# Altium PCB LNA_Rev3bPCB.PcbDoc
Units mm, origin at the board's own origin, x right, y up, seen from the top; angles counter-clockwise.
Board outline 65 x 56 mm, 2 copper layers (Top Layer, Bottom Layer); 48 components, 22 nets, 140 pads, 113 vias.
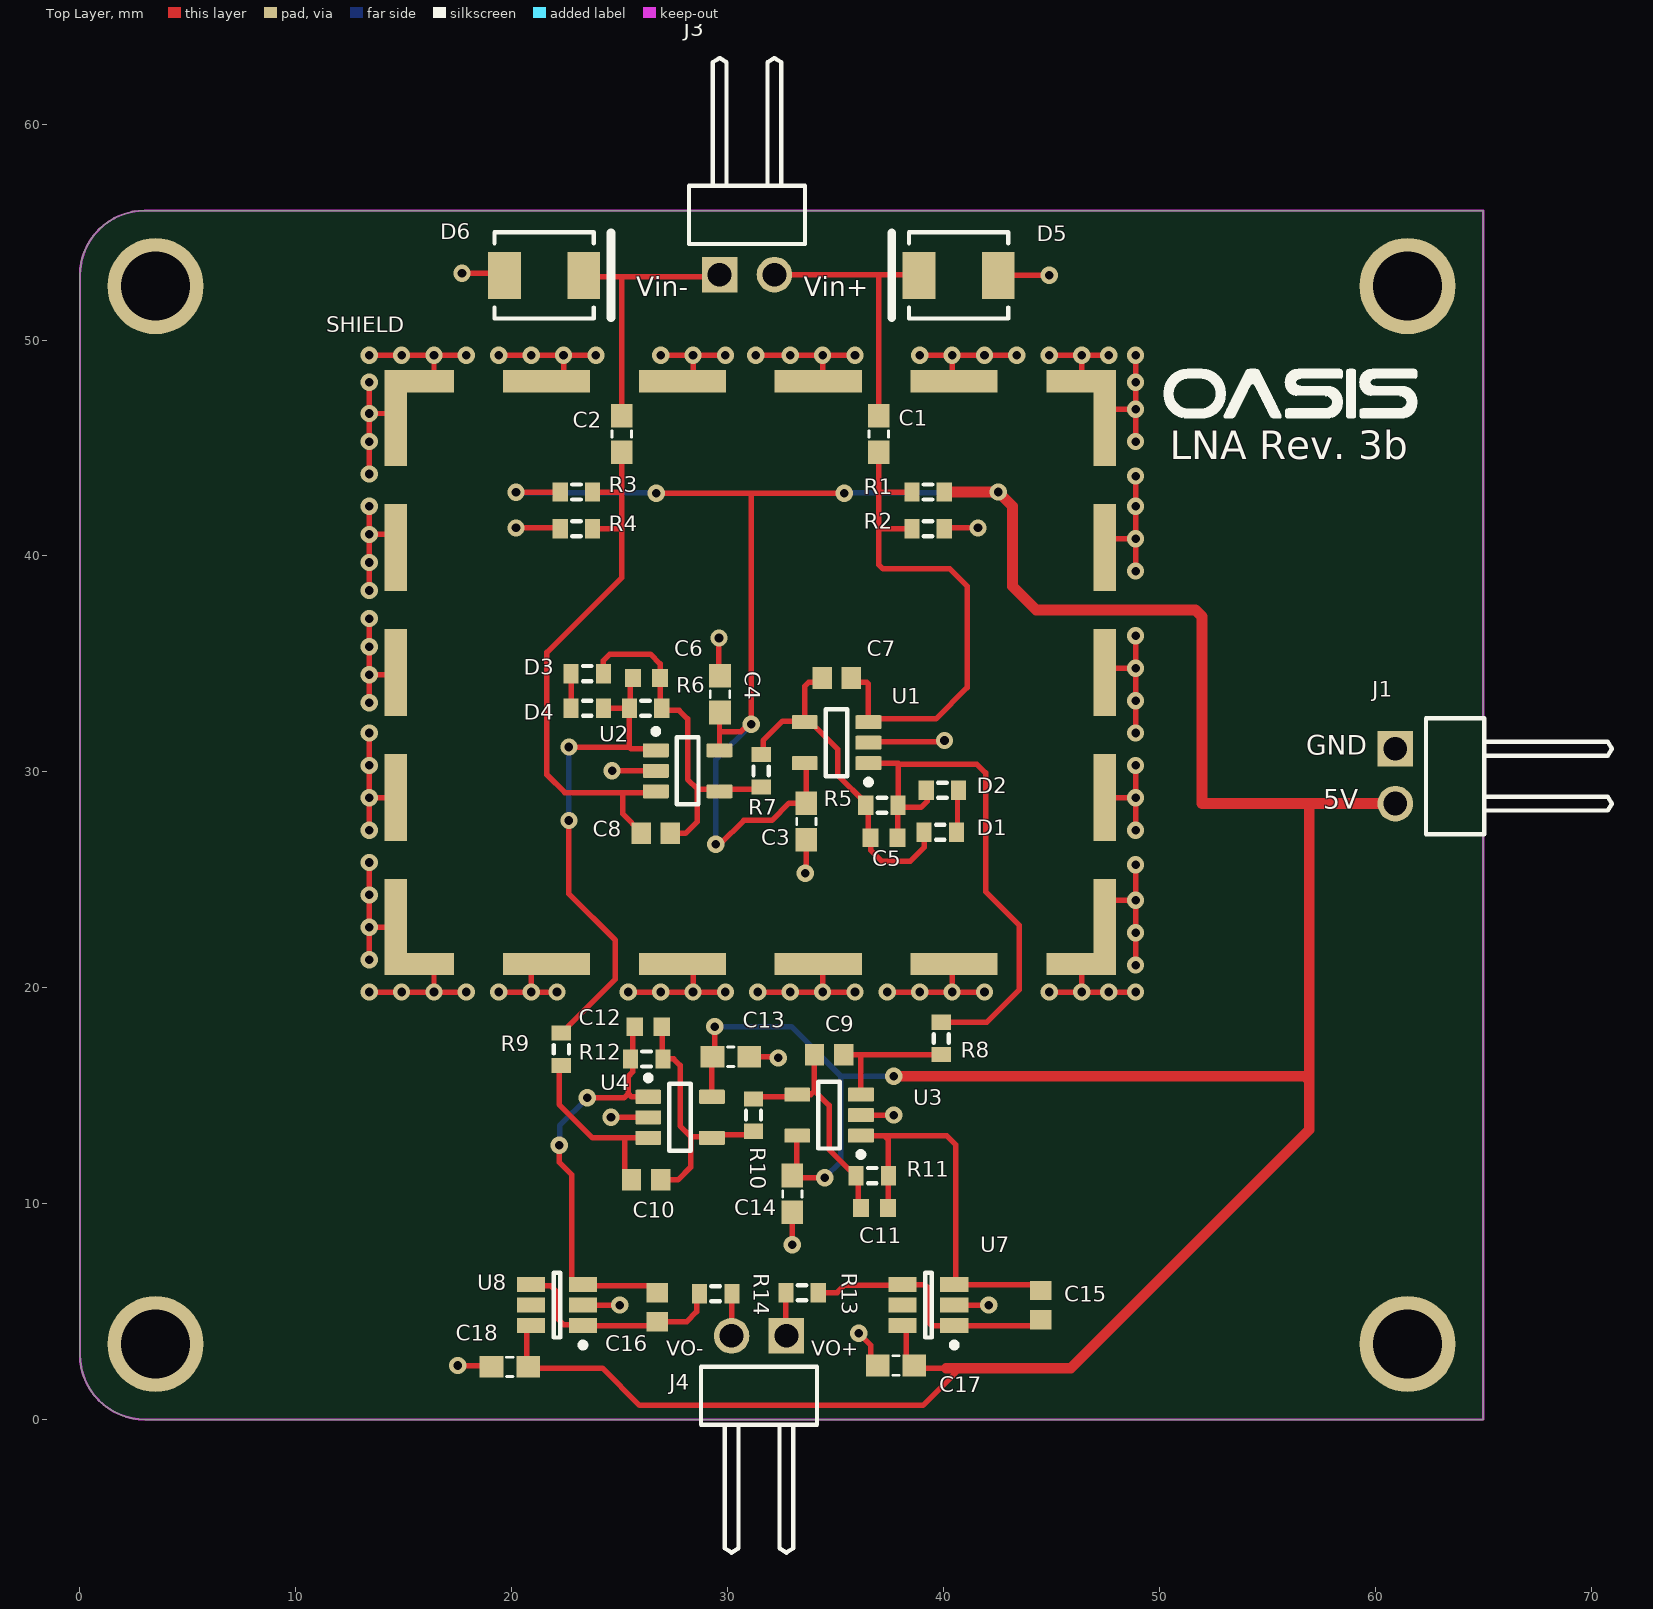
[diagram p0: Top Layer view]
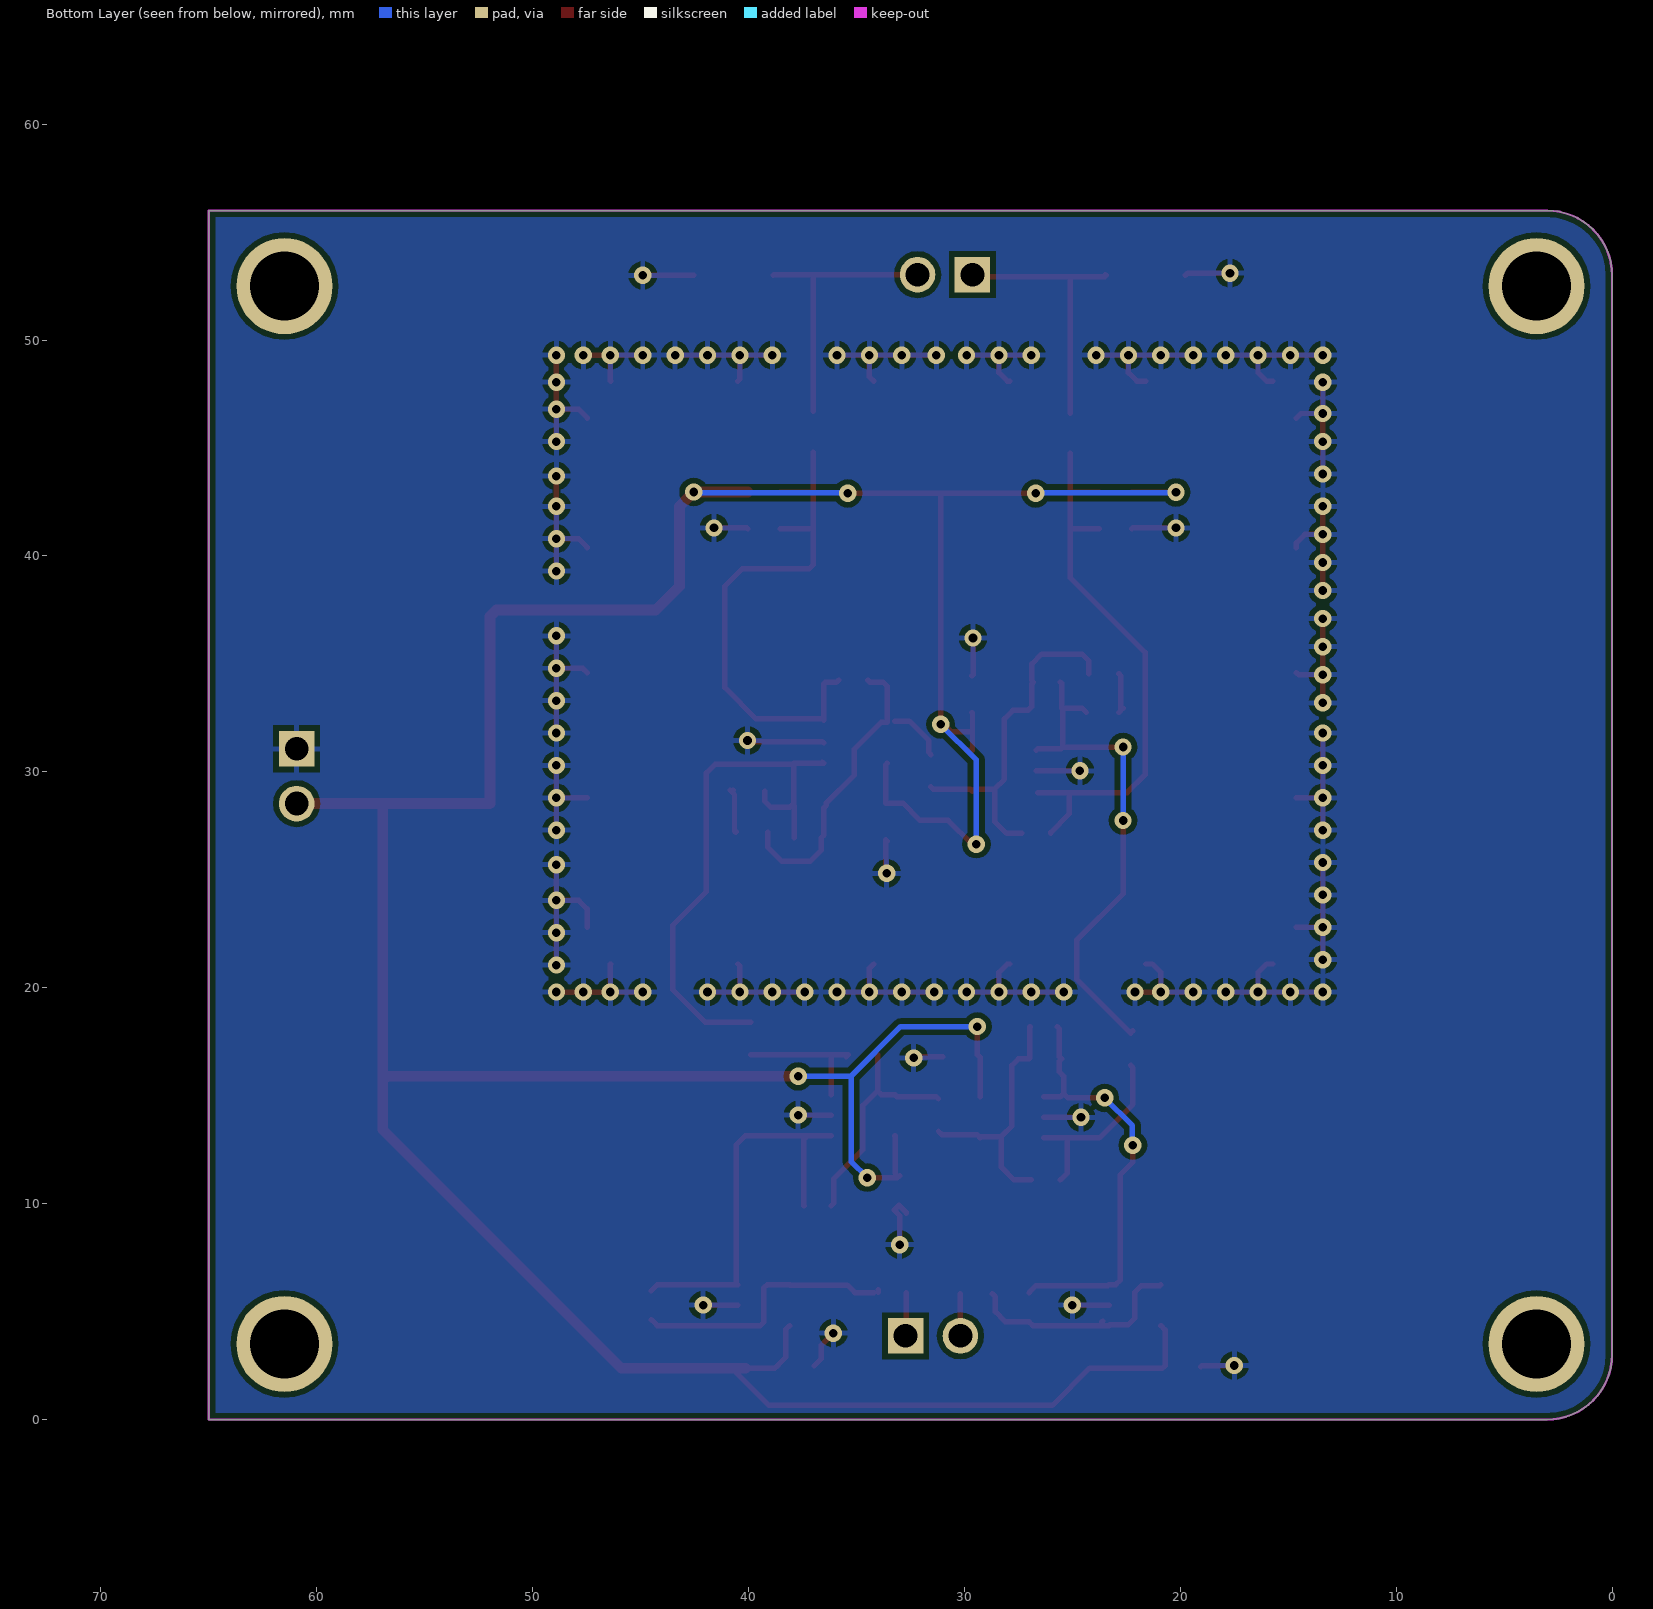
[diagram p1: Bottom Layer view, seen from below]

## Layer stack, top to bottom
Top Solder: solder mask 0.0102, Solder Resist, Dk 3.5
Top Layer: signal copper 0.0356
Dielectric 1: dielectric 0.32, FR-4, Dk 4.8
Bottom Layer: signal copper 0.0356
Bottom Solder: solder mask 0.0102, Solder Resist, Dk 3.5

## Board outline
0,3 ccw(c3,3) 3,0 65,0 65,56 3,56 ccw(c3,53) 0,53

## Design rules (kind name [scope] priority, off if disabled: settings)
Clearance [All] p1: gap=0.254 ignorepadtopadclearanceinfootprint=TRUE except(0: Arc-Hole Track-Hole SMDPad-Hole THPad-Hole Via-Hole Fill-Hole Poly-Hole Region-Hole Text-Hole; 0.15: Arc-Arc Arc-Track Arc-Via Track-Track Track-Via)
HoleSize [All] p1: absolutevalues=TRUE maxlimit=5 minlimit=0.025 maxpercent=80.000 minpercent=20.000
MinimumSolderMaskSliver [All] p1: minsoldermaskwidth=0.01
PolygonConnect [All] p1: connectstyle=Relief reliefconductorwidth=0.254 reliefentries=4 polygonreliefangle="90 Angle" airgapwidth=0.254
RoutingVias [All] p1: holewidth=0.711 width=1.27 viastyle="Through Hole" minholewidth=0.3 minwidth=0.3 maxholewidth=1 maxwidth=1.27
SilkToSilkClearance [All] p1: silktosilkclearance=0.1
SilkToSolderMaskClearance [IsPad] p1: minsilkscreentomaskgap=0.05 clearancetoexposedcopper=TRUE
SolderMaskExpansion [All] p1: expansion=0.102
Width [All] p1: maxlimit=0.51 minlimit=0.254 preferedwidth=0.254
26 further rules are at their usual default settings.

## Classes and differential pairs
component class Rev3b_LMH: C1 C2 C3 C4 C5 C6 C7 C8 C9 C10 C11 C12 C13 C14 C15 C16 C17 C18 D1 D2 D3 D4 D5 D6 J1 J3 J4 R1 R2 R3 R4 R5 R6 R10 R11 R12 R13 R14 SHIELD U1 U2 U3 U4 U7 U8

## Components (designator, comment, footprint, x,y, rotation, side; value= is the part's Value field where it differs from the comment)
C1 "Cap" *CAPC1608X90 37,45.65 r90 top value=3.3n
C2 "Cap" *CAPC1608X90 25.1,45.65 r90 top value=3.3n
C3 "Cap" *CAPC1608X90 33.65,27.7 r90 top value=100nF
C4 "Cap" *CAPC1608X90 29.65,33.6 r270 top value=100nF
C5 "22p" CAPC1608X90X35LL10T15 37.25,26.95 r0 top
C6 "22p" CAPC1608X90X35LL10T15 26.25,34.35 r180 top
C7 "220p" CAPC1608X87X35NL15T15 35.05,34.35 r180 top
C8 "220p" CAPC1608X87X35NL15T15 26.675,27.15 r0 top
C9 "15p" CAPC1608X87X35NL15T15 34.7,16.9 r180 top
C10 "15p" CAPC1608X87X35NL15T15 26.225,11.1 r0 top
C11 "22p" CAPC1608X90X35LL10T15 36.8,9.8 r0 top
C12 "22p" CAPC1608X90X35LL10T15 26.325,18.2 r180 top
C13 "Cap" *CAPC1608X90 30.15,16.8 r180 top value=100nF
C14 "Cap" *CAPC1608X90 33,10.45 r90 top value=100nF
C15 "56p" CAPC1608X87X35NL15T15 44.5,5.3 r270 top
C16 "56p" CAPC1608X87X35NL15T15 26.75,5.2 r270 top
C17 "Cap" *CAPC1608X90 37.8,2.5 r0 top value=100nF
C18 "Cap" *CAPC1608X90 19.913,2.437 r0 top value=100nF
D1 "D Zener" J1-0603 39.85,27.2 r0 top
D2 "D Zener" J1-0603 39.95,29.15 r0 top
D3 "D Zener" J1-0603 23.5,34.55 r180 top
D4 "D Zener" J1-0603 23.5,32.95 r180 top
D5 "SMBJ3V3-E3/52" VISH-DO-214AA-2_V 40.7,53 r180 top
D6 "SMBJ3V3-E3/52" VISH-DO-214AA-2_V 21.5,53 r0 top
J1 "61300211021" 61300211021 63.7,29.8 r90 top
J3 "61300211021" 61300211021 30.9,55.8 r180 top
J4 "61300211021" 61300211021 31.455,1.105 r0 top
R1 "Res1" J1-0603 39.288,42.963 r0 top value=8.2k
R2 "Res1" J1-0603 39.288,41.263 r180 top value=8.2k
R3 "Res1" J1-0603 23,42.963 r180 top value=8.2k
R4 "Res1" J1-0603 23,41.263 r0 top value=8.2k
R5 "Res1" J1-0603 37.15,28.45 r0 top value=4.7k
R6 "Res1" J1-0603 26.2,32.95 r180 top value=4.7k
R7 "Res1" J1-0603 31.55,30.05 r90 top value=560
R8 "Res1" J1-0603 39.9,17.65 r270 top value=820
R9 "Res1" J1-0603 22.3,17.15 r270 top value=820
R10 "Res1" J1-0603 31.2,14.1 r90 top value=2.2k
R11 "Res1" J1-0603 36.7,11.3 r0 top value=4.7k
R12 "Res1" J1-0603 26.25,16.7 r180 top value=4.7k
R13 "22" J1-0603 33.45,5.875 r0 top value=470
R14 "22" J1-0603 29.45,5.825 r180 top value=470
SHIELD "RF-SHIELD-V2" RF-SHIELD-V2 19.65,22.88 r0 top (schematic designator SHIELD?)
U1 "LMH6629MF/NOPB" DBV0005A_M 35.05,31.35 r180 top
U2 "LMH6629MF/NOPB" DBV0005A_M 28.15,30.05 r0 top
U3 "LMH6629MF/NOPB" DBV0005A_M 34.7,14.1 r180 top
U4 "LMH6629MF/NOPB" DBV0005A_M 27.8,14 r0 top
U7 "ADA4841-1YRJZ-R2" ADI-RJ-6_M 39.3,5.3 r180 top
U8 "ADA4841-1YRJZ-R2" ADI-RJ-6_M 22.1,5.3 r180 top

## Footprints (in the part's own frame and the unit in brackets; to place one, negate y for a bottom-side part, rotate by r counter-clockwise, add the part's x,y. Pads: shape width x height; smd on the part's side, far side on the other; paste and mask are expansions set on the pad)
61300211021 [mm] "Pin Header, pitch 2.54 mm, THT, Angled, single row, 2p"
  rect 1.65x1.65 hole 1.1: 1(1.27,2.77)
  round 1.65 hole 1.1: 2(-1.27,2.77)
  silkscreen extent -2.69,-7.27 2.69,1.35, body extent -2.54,-7.27 2.54,3.09, height 2.58
*CAPC1608X90 [mm]
  rect 1.1x1 smd: 1(-0.85,0) 2(0.85,0)
  silkscreen extent -0.15,-0.45 0.15,0.45
ADI-RJ-6_M [mm] "SOT23, 6-Leads, Body 2.9x1.6mm, Pitch 0.95mm, IPC Low Density"
  rect 1.3x0.7 smd: 1(-1.2,0.95) 2(-1.2,0) 3(-1.2,-0.95) 4(1.2,-0.95) 5(1.2,0) 6(1.2,0.95)
  silkscreen extent -1.33,-1.5 0.15,1.97, body extent -0.85,-1.5 0.85,1.5, height 1.45
CAPC1608X87X35NL15T15 [mm] "Chip Capacitor, 2-Leads, Body 1.60x0.80mm, IPC Medium Density"
  rect 0.9x1 smd: 1(-0.675,0) 2(0.675,0)
  body extent -0.87,-0.48 0.87,0.47, height 0.87
CAPC1608X90X35LL10T15 [mm] "Chip Capacitor, 2-Leads, Body 1.60x0.80mm, IPC High Density"
  rect 0.75x0.85 smd: 1(-0.625,0) 2(0.625,0)
  body extent -0.85,-0.45 0.85,0.45, height 0.9
DBV0005A_M [mm] "SOT23, 5-Leads, Body 3.05x1.75mm, Pitch 0.95mm, IPC Low Density"
  rrect15% 1.2x0.65 smd: 1(-1.475,0.95) 2(-1.475,0) 3(-1.475,-0.95) 4(1.475,-0.95) 5(1.475,0.95)
  silkscreen extent -1.6,-1.55 0.5,1.95, body extent -1.42,-1.46 1.42,1.46, height 1.08
J1-0603 [mm] "Chip Resistor, Body 1.6x0.8mm, IPC High Density"
  rect 0.7x0.9 smd: 1(-0.75,0) 2(0.75,0)
  silkscreen extent -0.2,-0.35 0.2,0.35, body extent -0.85,-0.48 0.85,0.48, height 0.9
RF-SHIELD-V2 [mm]
  rect 1.04x4.45 smd: 1(-5.03,-0.07) 1(-5.03,23.51) 1(27.83,-0.07) 1(27.83,23.51)
  rect 1.04x4.04 smd: 1(-5.03,5.93) 1(-5.03,11.72) 1(-5.03,17.51) 1(27.83,5.93) 1(27.83,11.72) 1(27.83,17.51)
  rect 3.23x1.04 smd: 1(-3.937,-1.78) 1(-3.937,25.22) 1(26.73,-1.78) 1(26.73,25.22)
  rect 4.04x1.04 smd: 1(1.96,-1.78) 1(1.96,25.22) 1(8.26,-1.78) 1(8.26,25.22) 1(14.55,-1.78) 1(14.55,25.22) 1(20.84,-1.78) 1(20.84,25.22)
  body extent -5.63,-2.38 28.75,25.85, height 5.1
VISH-DO-214AA-2_V [mm] "SMD, 2-Leads, Body 4.57x3.94mm"
  rect 1.52x2.18 smd: 1(-1.84,0) 2(1.84,0)
  silkscreen extent -2.3,-2 3.1,2, body extent -2.5,-1.97 2.5,1.97, height 2.44

## Part data
C1 C2 C3 C4 C13 C14 C17 C18: "Capacitor", LatestRevisionDate=17-Jul-2002, LatestRevisionNote="Re-released for DXP Platform.", PackageDescription="Radial Cap, Thru-Hole; 2 Leads; 0.3 in Pin Spacing", PackageReference=RAD-0.3, Published=8-Jun-2000, Publisher="Altium Limited"
C5 C6 C11 C12: library part CMP-2006-02592-1, Manufacturer=Murata, Part Number=GRM1885C1H100JA01D
C7 C8 C9 C10 C15 C16: library part CMP-2006-03317-1, Manufacturer=Kemet, Part Number=C0603C331J5GACTU
D1 D2 D3 D4: "Zener Diode", LatestRevisionDate=17-Jul-2002, LatestRevisionNote="Re-released for DXP Platform.", PackageDescription="Diode, Thru-Hole; 2 Leads; 0.7 in Pin Spacing", PackageReference=DIODE-0.7, Published=8-Jun-2000, Publisher="Altium Limited"
D5 D6: library part CMP-2000-07096-1, "Surface Mount TRANSZORB(R) Transient Voltage Suppressor, 60 A, 4.1 V, -65 to 175 degC, 2-Pin SMD (DO-214AA), RoHS, Tape and Reel", Capacitance=5200pF, Current, Leakage=200µA, Current, Ratings=200A, Manufacturer=Vishay, Package Description="2-Pin Surface Mount Device, Body 4.315 x 3.62 mm", Package Reference=DO-214AA, Power Dissipation=600W, Temperature, Junction, Maximum=175°C, Temperature, Operating=-65to175°C, Temperature, Operating, Maximum=+175°C, Temperature, Operating, Minimum=-65°C, Temperature, Operating, Range=-65to+175°C, Voltage, Breakdown=4.1V, Voltage, Clamping=10.3V, Brand/Series=TransZorb®Series, Configuration=Single, Current, Surge=200A, Datasheet URL=http://datasheet.octopart.com/SMBJ3V3-E3-52-Vishay-datasheet-62319170.pdf, Datasheet Version=12/2013, Dimensions=4.57x3.94x2.44mm, Direction=Uni-Directional, Height=2.44mm, Length=4.57mm, Manufacturer URL=http://www.vishay.com/, Mounting Technology=SurfaceMount, Mounting Type=SurfaceMount, Package Type=DO-214AA, Primary Type=Diodes, Suppressor Type=Voltage, Termination=Solder, Type=TVS, Weight=0.096g, Width=3.94mm
J1 J3 J4: library part CMP-1502-01059-1, "THT Angled Pin Header WR-PHD, Pitch 2.54 mm, Single Row, 2 pins", Contact Resistance=20mOhm, Manufacturer="Wurth Elektronik", Operating Temperature=-40to105degC, Rated Current=3A, Withstanding Voltage=500VAC, Working Voltage=250VAC, Datasheet URL=https://katalog.we-online.de/em/datasheet/6130xx11021.pdf, Gender=Male, Manufacturer URL=http://www.we-online.de, Mounting Technology=THT, Orientation=Angled, Package Reference=61300211021, Packaging=Bag, Part Number=61300211021, Pin Number=2, Pitch=2.54mm, Publisher=WurthElektronik, Row Number=Single
R1 R2 R3 R4 R5 R6 R7 R8 R9 R10 R11 R12: "Resistor", LatestRevisionDate=17-Jul-2002, LatestRevisionNote="Re-released for DXP Platform.", PackageDescription="Axial Device, Thru-Hole; 2 Leads; 0.3 in Pin Spacing", PackageReference=AXIAL-0.3, Published=8-Jun-2000, Publisher="Altium Limited"
R13 R14: library part Res1, "Resistor", LatestRevisionDate=17-Jul-2002, LatestRevisionNote="Re-released for DXP Platform.", PackageDescription="Axial Device, Thru-Hole; 2 Leads; 0.3 in Pin Spacing", PackageReference=AXIAL-0.3, Published=8-Jun-2000, Publisher="Altium Limited"
U1 U2 U3 U4: library part CMP-0055-01620-3, "Ultra-Low Noise, High-Speed Operational Amplifier with Shutdown, 5-pin SOT-23, 1000 Reel", Manufacturer="Texas Instruments", Package Reference=DBV0005A, PackageTopMarking=AE7A*XTT, PowerWise=Y, ComponentLink1Description="Datasheet URL", ComponentLink1URL=http://www.ti.com/general/docs/lit/getliterature.tsp?genericPartNumber=LMH6629&fileType=pdf, CompType=Amplifiers, High-Reliability=Y, PackageDescription="Molded SOT-23, .115 x .063 x .040 in Body, 5 Lead, .0375 in Pitch", PartNumber=LMH6629MF/NOPB, PinCount=5, RoHS=Y
U7 U8: library part CMP-0384-01553-2, "Single Channel Low Wide Band Noise Operational Amplifier, 80 MHz BW, 13 V/us SR, Industrial, 6-pin SOT23 (RJ-6), Reel", Amplifiers Per Package=1, Generic Part Number=ADA4841-1, Input Bias Current=3uA, Input Offset Voltage=40uV, Manufacturer="Analog Devices", Code_JEDEC=MO-178-AB, ComponentLink1Description="Manufacturer URL", ComponentLink1URL=http://www.analog.com/en/index.html, ComponentLink2Description=Datasheet, ComponentLink2URL=http://www.analog.com/static/imported-files/data_sheets/ADA4841-1_4841-2.pdf, ComponentLink3Description="Package Specification", ComponentLink3URL=http://www.analog.com/static/imported-files/packages/PKG_PDF/SOT-23(RJ)/RJ_6.pdf, ComponentLink4Description="Reference Circuit", ComponentLink4URL=http://www.analog.com/en/all-operational-amplifiers-op-amps/operational-amplifiers-op-amps/ada4841-1/products/product.html#product-recommendations, DatasheetVersion="Rev. E", Iq/Amp=1.5mA, Mounting Technology="Surface Mount", PackageDescription="6-Pin Small Outline Transistor Package, Body 2.9 x 1.6 mm, Pitch 0.95 mm", PackageReference=RJ-6, PackageVersion=121608-A, PartNumber=ADA4841-1YRJZ-R2, RevisionNote="Reference Circuit URL fixed", Slew Rate=13V/us, Small Signal Bandwidth=80MHz, V Span Max=12V, V Span Min=2.7V

## Free pads (board coordinates)
  round 4.45 hole 3.2: 11(3.5,3.5) 11(3.5,52.5) 11(61.5,3.5) 11(61.5,52.5)

## Via types
v1: diameter 0.8, hole 0.4, Top Layer to Bottom Layer, 113 vias

## Nets (pads, with @x,y where several pads share a name; then routed paths per layer and width w, separated by ;. In a path a pad name is that pad's centre, name@x,y a point inside that pad or via, vN(x,y) a via of type N, cw(c..) or ccw(c..) an arc to the next point about the centre after c; other vN are vias at no path point)
+5V: C3.2 C4.2 C13.2 C14.2 C17.2 C18.2 J1.2 R1.2 R3.2 U1.5 U2.5 U3.5 U4.5 U7.6 U8.6 | length 189.8
  Top Layer w0.254: v1(20.2,42.95) R3.2@22.25,42.95 ; U8.6 20.7,4.15 20.7,2.5 C18.2 20.825,2.375 24.2,2.375 25.925,0.65 39.05,0.65 40.6,2.2 40.6,2.375 ; v1(26.7,42.9) 31.05,42.9 ; U4.5 29.275,16.775 C13.2 29.4,16.9 v1(29.4,18.2) ; v1(29.45,26.65) 29.65,26.65 30.75,27.75 32.05,27.75 32.85,28.55 C3.2 33.65,30.325 U1.5 ; C4.2 29.625,32.725 29.625,31.863 ; U2.5@29.9,31 U2.5 29.625,31.863 ; C14.2 33.1,11.2 v1(34.5,11.2) ; C14.2@33.2,11.4 33.2,13.125 U3.5 ; v1(35.4,42.9) 31.05,42.9 ; U7.6 38.277,4.173 38.277,2.873 C17.2 38.775,2.375 40.125,2.375 ; 29.625,31.863 30.615,31.863 30.952,32.2 v1(31.1,32.2) 31.1,42.85 31.05,42.9
  Top Layer w0.5: v1(37.7,15.9) 56.745,15.9 56.945,15.7 ; R1.2 v1(42.537,42.963) 43.2,42.3 43.2,38.6 44.3,37.5 51.67,37.5 51.97,37.2 51.97,28.53 56.945,28.53 ; 40.125,2.375 40.6,2.375 45.9,2.375 56.945,13.42 56.945,15.7 ; J1.2 56.945,28.53 ; 56.945,15.7 56.945,28.53
  Bottom Layer w0.254: v1(20.2,42.95) 20.225,42.925 26.675,42.925 v1(26.7,42.9) ; v1(29.4,18.2) 32.95,18.2 35.25,15.9 ; v1@29.45,26.6 v1(29.45,26.65) 29.45,30.55 v1(31.1,32.2) ; v1(34.5,11.2) 35.25,11.95 35.25,15.9 ; v1(35.4,42.9) 35.431,42.931 42.506,42.931 v1(42.537,42.963) ; v1(37.7,15.9) 35.25,15.9
GND: C3.1 C4.1 C13.1 C14.1 C17.1 C18.1 D5.1 D6.1 J1.1 R2.1 R4.1 SHIELD.1 U1.2 U2.2 U3.2 U4.2 U7.2 U8.2 | length 154
  Top Layer w0.254: v1(13.4,19.8) v1(14.9,19.8) v1(16.4,19.8) ; v1(13.4,21.3) v1(13.4,22.8) ; v1(13.4,25.8) v1(13.4,24.3) v1(13.4,22.8) ; v1(13.4,27.3) v1(13.4,28.8) ; v1(13.4,31.8) v1(13.4,30.3) v1(13.4,28.8) ; v1(13.4,33.2) v1(13.4,34.5) ; v1(13.4,37.1) v1(13.4,35.8) v1(13.4,34.5) ; v1(13.4,38.4) v1(13.4,39.7) v1(13.4,41) ; v1(13.4,42.3) v1(13.4,41) ; v1(13.4,43.8) v1(13.4,45.3) v1(13.4,46.6) ; v1(13.4,48.05) v1(13.4,46.6) ; v1(13.4,49.3) v1(14.9,49.3) v1(16.4,49.3) ; SHIELD.1@14.62,22.81 14.61,22.8 v1(13.4,22.8) ; SHIELD.1@14.62,28.81 14.61,28.8 v1(13.4,28.8) ; SHIELD.1@14.62,34.6 14.52,34.5 v1(13.4,34.5) ; SHIELD.1@14.62,40.39 14.62,40.607 14.227,41 v1(13.4,41) ; SHIELD.1@14.62,46.39 14.41,46.6 v1(13.4,46.6) ; SHIELD.1@15.713,21.1 16.007,21.1 16.4,20.707 v1(16.4,19.8) ; SHIELD.1@15.713,48.1 16.007,48.1 16.4,48.493 v1(16.4,49.3) ; v1(17.5,2.5) 19,2.5 C18.1 ; v1(17.7,53.1) 19.66,53.1 D6.1@19.76,53 ; v1(17.9,19.8) v1(16.4,19.8) ; v1(17.9,49.3) v1(16.4,49.3) ; v1(19.4,19.8) v1(20.9,19.8) ; v1(19.4,49.3) v1(20.9,49.3) v1(22.4,49.3) ; v1(20.2,41.3) 22.213,41.3 R4.1 ; SHIELD.1@21.61,21.1 21.293,21.1 20.9,20.707 v1(20.9,19.8) ; SHIELD.1@21.61,48.1 22.007,48.1 22.4,48.493 v1(22.4,49.3) ; v1(22.1,19.8) v1(20.9,19.8) ; U8.2 v1(25,5.3) ; v1(23.9,49.3) v1(22.4,49.3) ; v1(24.6,14) U4.2 ; v1(24.65,30.05) U2.2 ; v1(25.4,19.8) v1(26.9,19.8) v1(28.4,19.8) ; v1(26.9,49.3) v1(28.4,49.3) ; SHIELD.1@27.91,21.1 28.007,21.1 28.4,20.707 v1(28.4,19.8) ; SHIELD.1@27.91,48.1 28.007,48.1 28.4,48.493 v1(28.4,49.3) ; v1(29.6,36.2) 29.6,34.5 C4.1 ; v1(29.9,19.8) v1(28.4,19.8) ; v1(29.9,49.3) v1(28.4,49.3) ; C13.1 v1@32.2,16.8 ; v1(31.3,49.3) v1(32.9,49.3) v1(34.4,49.3) ; v1(31.4,19.8) v1(32.9,19.8) v1(34.4,19.8) ; C14.1@32.7,9.55 32.7,9.6 33.025,9.925 33.25,9.7 33,9.45 v1(33,8.1) ; v1(33.6,25.3) 33.6,25.55 33.65,25.6 C3.1@33.65,26.7 ; SHIELD.1@34.2,21.1 34.4,20.9 v1(34.4,19.8) ; SHIELD.1@34.2,48.1 34.4,48.3 v1(34.4,49.3) ; v1(35.9,19.8) v1(34.4,19.8) ; v1(35.9,49.3) v1(34.4,49.3) ; v1(36.075,4) 36.627,3.448 36.627,2.823 C17.1 ; U3.2 v1(37.7,14.1) ; U1.2 36.575,31.4 40,31.4 v1(40.05,31.45) ; v1(37.4,19.8) v1(38.9,19.8) v1(40.4,19.8) ; v1(38.9,49.3) v1(40.4,49.3) ; R2.1 40.075,41.3 v1(41.6,41.3) ; SHIELD.1@40.49,21.1 40.4,21.01 v1(40.4,19.8) ; SHIELD.1@40.49,48.1 40.4,48.19 v1(40.4,49.3) ; U7.2 v1(42.1,5.3) ; v1(41.9,19.8) v1(40.4,19.8) ; D5.1 v1(44.9,53) ; v1(43.4,49.3) v1(41.9,49.3) v1(40.4,49.3) ; v1(44.9,19.8) v1(46.4,19.8) ; v1(44.9,49.3) v1(46.4,49.3) ; SHIELD.1@46.38,21.1 46.4,21.08 v1(46.4,19.8) ; SHIELD.1@46.38,48.1 46.4,48.12 v1(46.4,49.3) ; SHIELD.1@47.48,22.81 47.48,23.657 47.873,24.05 v1(48.9,24.05) ; SHIELD.1@47.48,28.81 47.49,28.8 v1(48.9,28.8) ; SHIELD.1@47.48,34.6 47.68,34.8 v1(48.9,34.8) ; SHIELD.1@47.48,40.39 47.48,40.407 47.873,40.8 v1(48.9,40.8) ; SHIELD.1@47.48,46.39 47.48,46.407 47.873,46.8 v1(48.9,46.8) ; v1(47.65,49.3) v1(46.4,49.3) ; v1(48.9,19.8) v1(47.65,19.8) v1(46.4,19.8) ; v1(48.9,21.05) v1(48.9,22.55) v1(48.9,24.05) ; v1(48.9,25.7) v1(48.9,24.05) ; v1(48.9,27.3) v1(48.9,28.8) ; v1(48.9,30.3) v1(48.9,28.8) ; v1(48.9,31.8) v1(48.9,33.3) v1(48.9,34.8) ; v1(48.9,36.3) v1(48.9,34.8) ; v1(48.9,39.3) v1(48.9,40.8) ; v1(48.9,43.7) v1(48.9,42.3) v1(48.9,40.8) ; v1(48.9,45.3) v1(48.9,46.8) ; v1(48.9,49.3) v1(48.9,48.05) v1(48.9,46.8) ; C3.1@33.65,26.7 C3.1 33.575,26.775 C3.1@33.65,26.7
  other v1: 32.35,16.75
NetC1_1: C1.1 C7.1 R1.1 R2.2 U1.3 | length 25.2
  Top Layer w0.254: C7.1@35.825,34.25 35.925,34.15 36.45,34.15 36.525,34.075 36.525,32.4 36.575,32.45 39.65,32.45 41.1,33.9 41.1,38.6 40.3,39.4 37.2,39.4 37,39.6 37,41.3 ; C1.1 37,43.05 ; R2.2 37.037,41.263 37,41.3 ; R1.1 37.087,42.963 37,43.05 ; 37,41.3 37,43.05
NetC2_1: C2.1 C8.1 R3.1 R4.2 U2.3 | length 26.5
  Top Layer w0.254: R4.2 25.063,41.263 25.1,41.3 ; R3.1@23.75,42.95 25,42.95 ; C2.1@25.1,44.75 25.1,41.3 ; C8.1 26,27.2 25.15,28.05 25.15,29.034 ; U2.3@26.609,29.034 25.15,29.034 ; 25.1,41.3 25.1,39 21.634,35.534 21.634,29.866 22.466,29.034 25.15,29.034
NetC5_1: C5.1 C7.2 D1.1 R5.1 R7.2 U1.4 | length 16.2
  Top Layer w0.254: R7.2 31.65,30.9 31.65,31.45 32.55,32.35 U1.4@33.225,32.35 ; U1.4 33.85,32.3 35.113,31.038 35.113,29.837 36.4,28.55 R5.1 36.513,28.337 36.513,27.062 C5.1 36.625,26.375 37.15,25.85 38.45,25.85 39.1,26.5 D1.1 ; U1.4@33.575,32.4 33.575,33.975 33.75,34.15 34.375,34.15 C7.2@34.475,34.25
NetC5_2: C5.2 D2.1 R5.2 R8.1 U1.1 | length 26.1
  Top Layer w0.254: U1.1@36.575,30.45 U1.1 37.9,30.4 ; C5.2 37.888,26.962 37.888,28.437 R5.2 R5.2@37.9,28.55 ; D2.1@39.25,29.1 39.25,28.65 38.95,28.35 38.1,28.35 R5.2@37.9,28.55 ; R8.1 42,18.4 43.5,19.9 43.5,22.9 41.95,24.45 41.95,29.95 41.55,30.35 37.95,30.35 37.9,30.4 ; R5.2@37.9,28.55 37.9,30.4
NetC6_1: C6.1 C8.2 D3.1 R6.1 R7.1 U2.4 | length 16.4
  Top Layer w0.254: D3.1 24.25,35.15 24.55,35.45 26.426,35.45 26.875,35.001 C6.1@26.875,34.25 ; C6.1@26.8,34.15 26.875,34.075 26.875,33.025 R6.1 27.05,32.85 27.75,32.85 28.15,32.45 28.15,29.65 28.595,29.205 ; C8.2 28.05,27.15 28.595,27.695 28.595,29.205 ; R7.1 31.45,29.2 29.725,29.2 U2.4 29.52,29.205 28.595,29.205
NetC6_2: C6.2 D4.1 R6.2 R9.1 U2.1 | length 23.6
  Top Layer w0.254: R9.1@22.2,18 R9.1 24.8,20.4 24.8,22.2 22.65,24.35 v1(22.65,27.75) ; v1(22.65,31.15) 25.45,31.15 ; D4.1@24.35,32.75 24.55,32.95 R6.2 25.45,31.15 ; R6.2@25.5,32.95 25.5,34.1 C6.2@25.55,34.15 ; U2.1 26.609,31.066 25.534,31.066 25.45,31.15
  Bottom Layer w0.254: v1(22.65,27.75) v1(22.65,31.15)
NetC9_1: C9.1 R8.2 U3.3 | length 6.5
  Top Layer w0.254: C9.1@35.475,16.8 C9.1 36.2,16.9 ; U3.3 36.175,16.875 36.2,16.9 ; R8.2 36.2,16.9
NetC9_2: C9.2 C11.1 R10.2 R11.1 U3.4 | length 10.9
  Top Layer w0.254: R10.2 31.3,14.95 33.125,14.95 U3.4 33.85,15.05 34.025,15.225 ; C9.2 34.025,15.225 ; C11.1@36.175,9.9 36.063,10.013 36.063,11.137 34.7,12.5 34.7,14.55 34.025,15.225
NetC10_1: C10.1 R9.2 U4.3 | length 8.7
  Top Layer w0.254: R9.2 22.2,16.3 22.2,14.6 23.75,13.05 25.3,13.05 ; C10.1 25.227,11.423 25.227,12.977 25.3,13.05 ; U4.3 25.3,13.05
NetC10_2: C10.2 C12.1 R10.1 R12.1 U4.4 | length 12
  Top Layer w0.254: C10.2 27.7,11.1 28.294,11.694 28.294,13.106 ; C12.1 26.975,18.175 26.975,16.725 R12.1 27.5,16.7 27.8,16.4 27.8,13.6 28.294,13.106 ; R10.1 31.05,13.2 29.425,13.2 U4.4 29.219,13.106 28.294,13.106
NetC11_2: C11.2 C15.1 R11.2 U3.1 U7.3 | length 18.5
  Top Layer w0.254: U3.1 37.25,13.15 ; C11.2@37.425,9.9 37.438,9.913 37.438,11.288 R11.2 37.45,12.95 37.25,13.15 ; C15.1 44.225,6.25 U7.3 40.577,6.327 40.577,12.723 40.15,13.15 37.25,13.15
NetC12_2: C12.2 C16.1 R12.2 U4.1 U8.3 | length 20
  Top Layer w0.254: v1(22.2,12.7) 22.2,11.919 22.777,11.342 22.777,6.473 23,6.25 U8.3 23.352,6.198 26.677,6.198 C16.1@27,5.875 ; v1(23.5,14.9) 25.2,14.9 25.4,15.1 ; C12.2 25.6,18.1 25.6,16.8 R12.2 25.6,16.6 25.6,16.1 25.4,15.9 25.4,15.1 ; U4.1 25.55,14.95 25.4,15.1
  Bottom Layer w0.254: v1(22.2,12.7) 22.216,12.716 22.216,13.616 v1(23.5,14.9)
NetC15_2: C15.2 R13.2 U7.1 U7.4 | length 12.4
  Top Layer w0.254: R13.2@34,5.9 R13.2@34,6 ; R13.2 35.075,5.875 35.425,6.225 38.071,6.225 38.073,6.223 U7.4 39.131,6.25 39.3,6.081 39.3,4.5 39.45,4.35 U7.1 44.225,4.35 C15.2
NetC16_2: C16.2 R14.2 U8.1 U8.4 | length 10.4
  Top Layer w0.254: U8.4 20.95,6.2 21.8,6.2 22.1,5.9 22.1,4.7 22.4,4.4 23.25,4.4 U8.1 26.825,4.35 27,4.525 28.1,4.525 28.569,4.994 28.569,5.694 R14.2 ; U8.1@23.6,4.55 U8.1@23.631,4.519
NetD1_2: D1.2 D2.2 | length 2.1
  Top Layer w0.254: D1.2@40.575,27.225 D1.2 40.65,27.25 40.65,28.95 D2.2@40.85,29.15 ; D2.2 D2.2@40.725,29.125
NetD3_2: D3.2 D4.2 | length 1.9
  Top Layer w0.254: D4.2@22.65,32.95 D4.2@22.85,32.75 ; D4.2 22.75,34.45 D3.2@22.85,34.55
Vin+: C1.2 D5.2 J3.2 | length 13
  Top Layer w0.254: J3.2@32.17,52.93 J3.2@32.176,52.924 ; J3.2 37,53.03 ; C1.2@37,46.7 37,53.03 ; D5.2 38.83,53.03 37,53.03
Vin-: C2.2 D6.2 J3.1 | length 12.6
  Top Layer w0.254: D6.2@23.47,53.03 23.44,53 23.509,52.93 25.1,52.93 ; C2.2@25.1,46.619 25.1,52.93 ; J3.1@29.63,52.93 25.1,52.93
VO+: J4.1 R13.1 | length 2
  Top Layer w0.254: R13.1 32.7,3.9 J4.1
VO-: J4.2 R14.1 | length 2
  Top Layer w0.254: J4.2 30.192,3.883 30.192,5.817 R14.1
pads on no net: U7.5 U8.5

## Polygon pours and split planes (outlines as drawn)
GND on Bottom Layer "Top Layer-No Net" (solid, pour order 0): 0,3 ccw(c3,3) 3,0 65,0 65,56 3,56 ccw(c3,53) 0,53

## Keep-outs
Keep-Out Layer:
  the board outline again, w0.1

## Silkscreen, mask and mechanical layers (free items; w line width, h text height)
Top Overlay:
  drawing of 5 lines, arcs and shapes, not listed
  text "Vin-" at 25.775,51.725 h1.52
  text "Vin+" at 33.525,51.725 h1.52
  text "LNA Rev. 3b" at 50.475,44.05 h2.25
  text "GND" at 56.8,30.5 h1.52
  text "5V" at 57.6,28 h1.52
  text "VO-" at 27.15,2.725 h1.2
  text "VO+" at 33.875,2.725 h1.2